# Altium PCB PCB_Rev1.PcbDoc
Units mil, origin at the board's own origin, x right, y up, seen from the top; angles counter-clockwise.
Board outline 1472.44 x 1251.97 mil, 4 copper layers (Top Layer, Layer 1 (GND), Layer 2 (PWR), Bottom Layer), stack 61.2 mil thick; 58 components, 41 nets, 213 pads, 68 vias.
Unrouted connection lines stored in the file: 48.
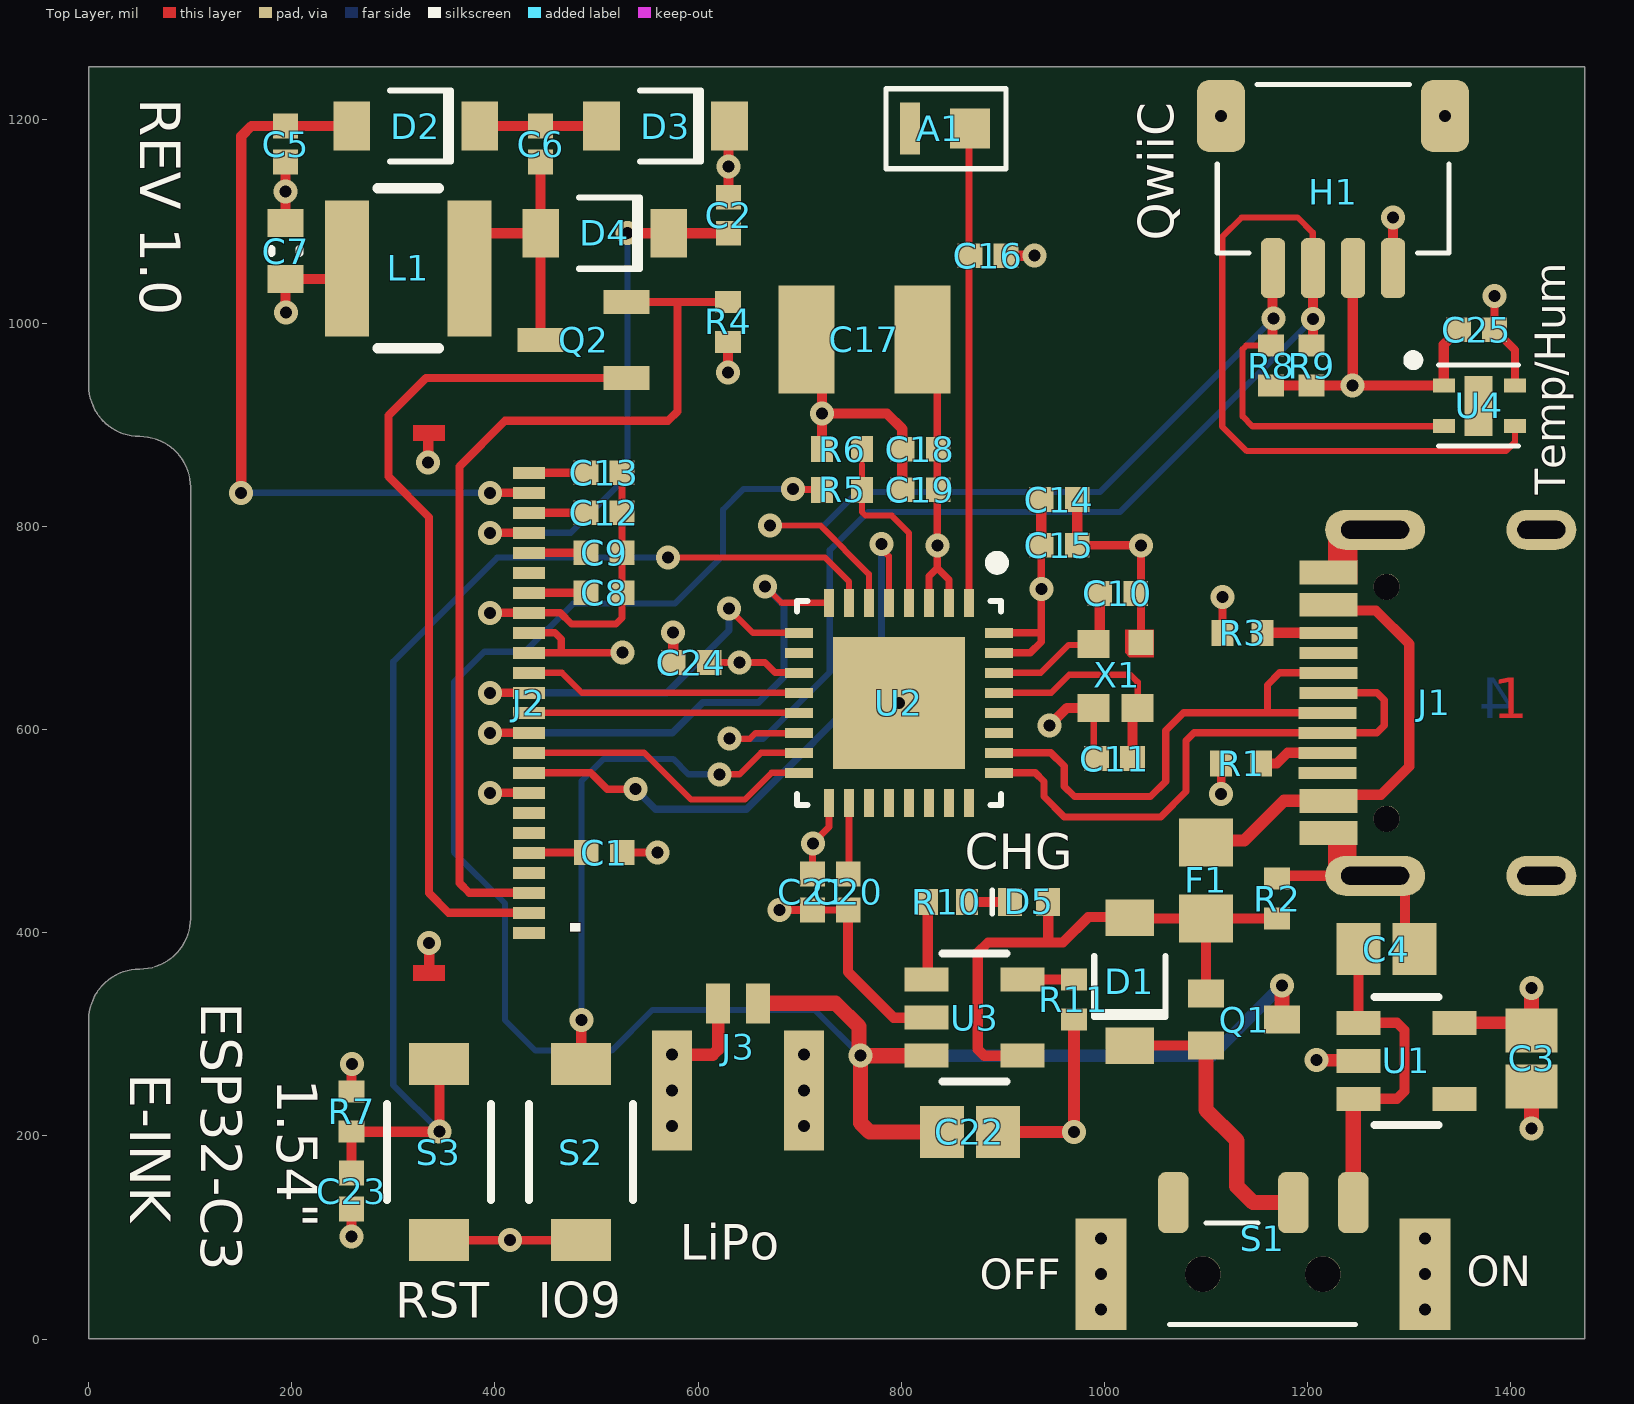
[diagram p0: Top Layer view]
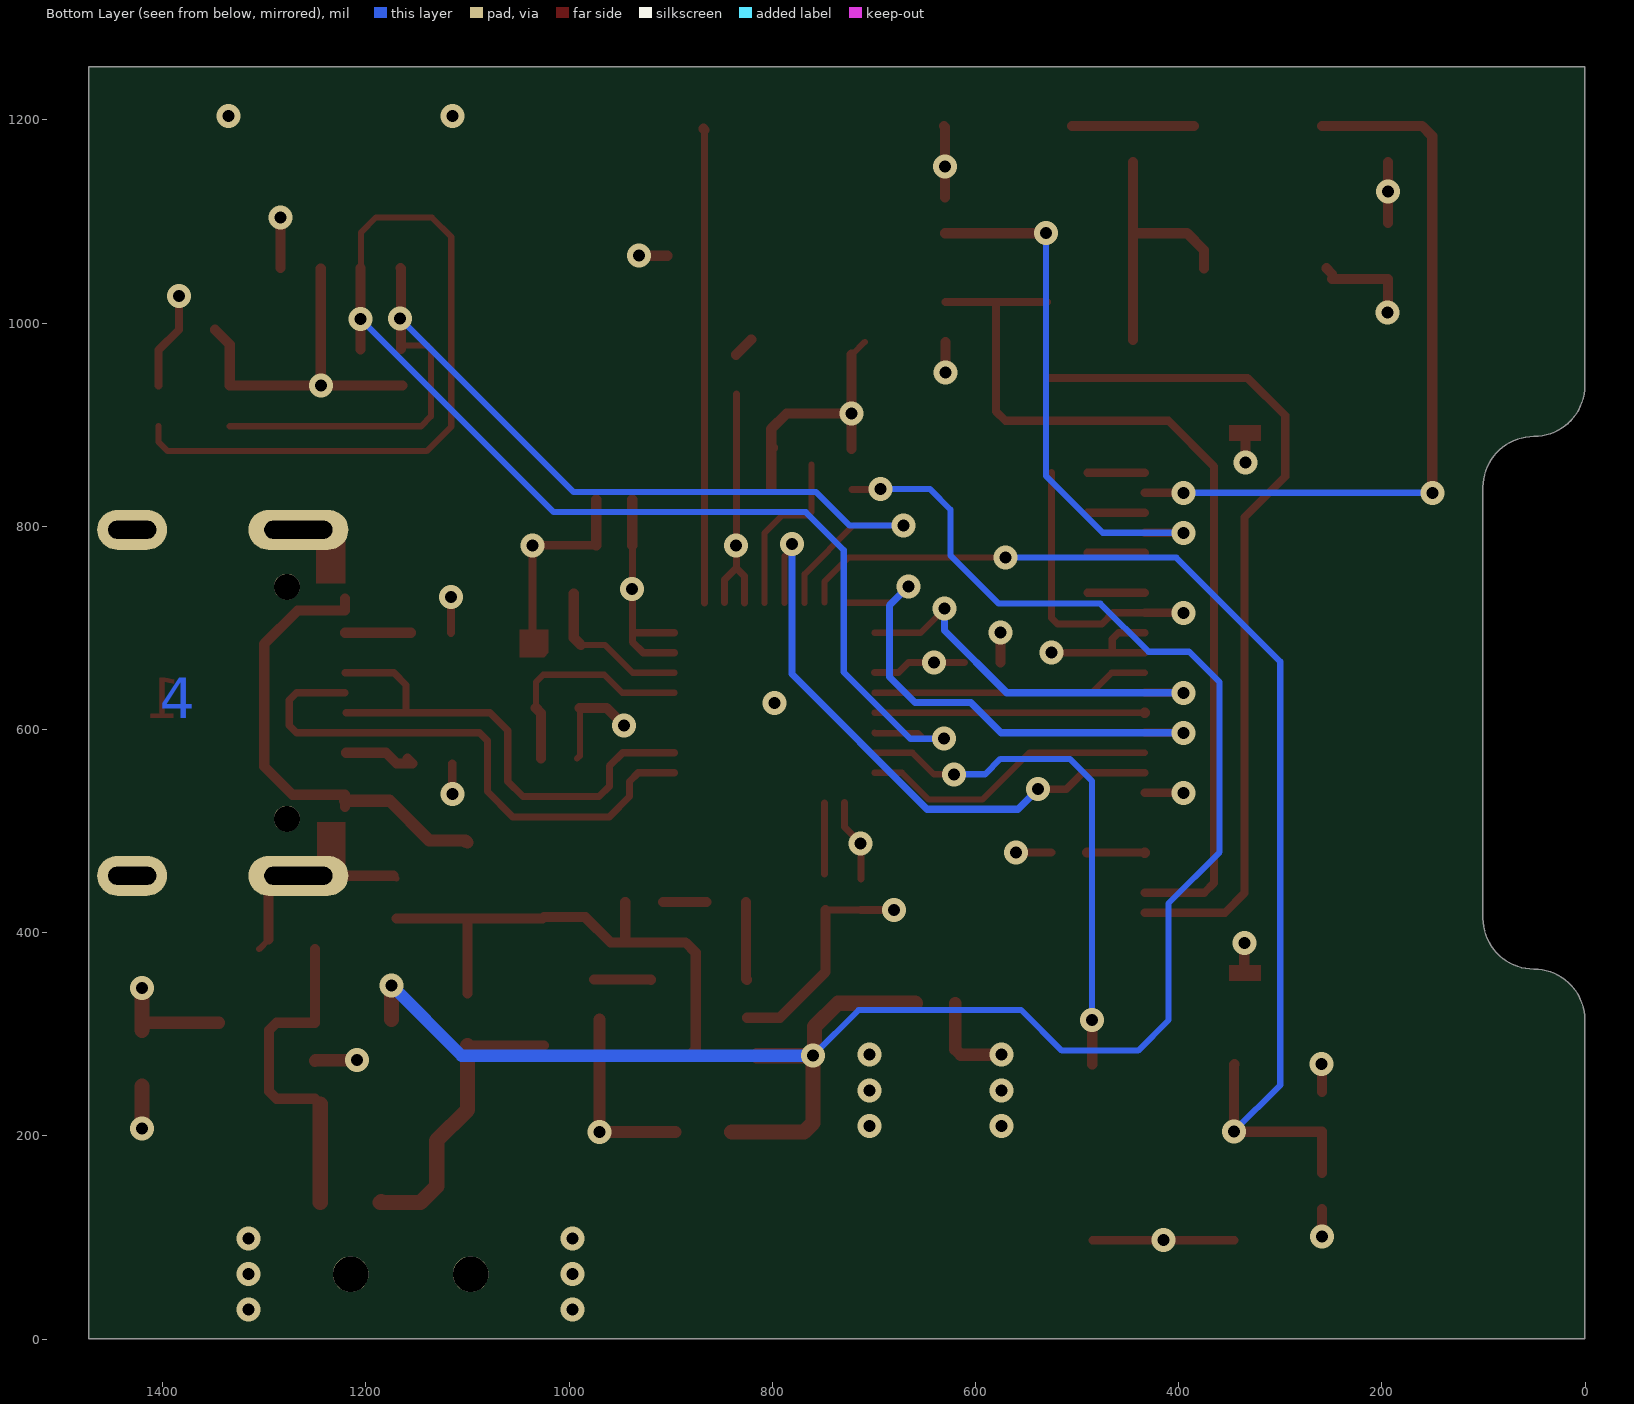
[diagram p1: Bottom Layer view, seen from below]
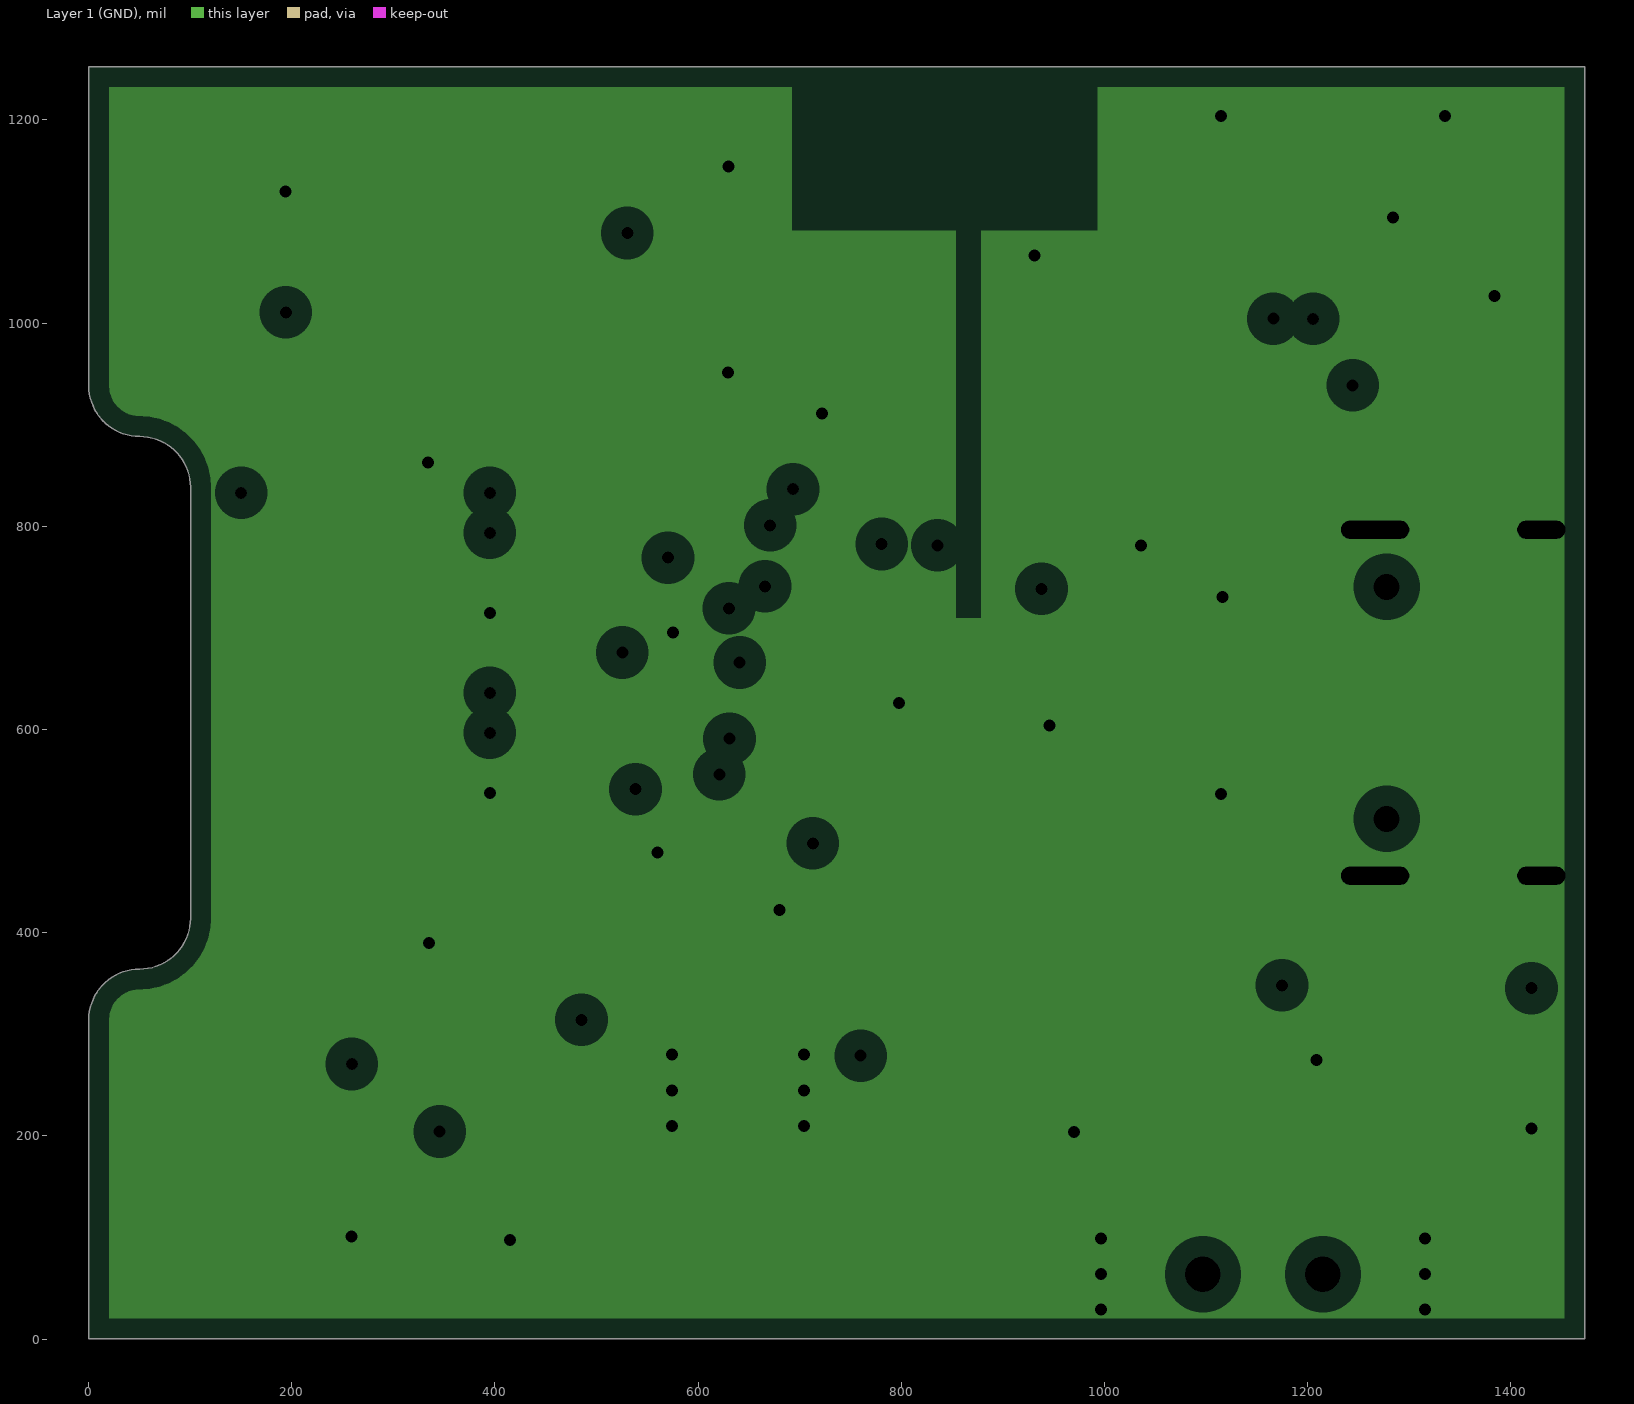
[diagram p2: Layer 1 (GND), clearances drawn from the general rule]
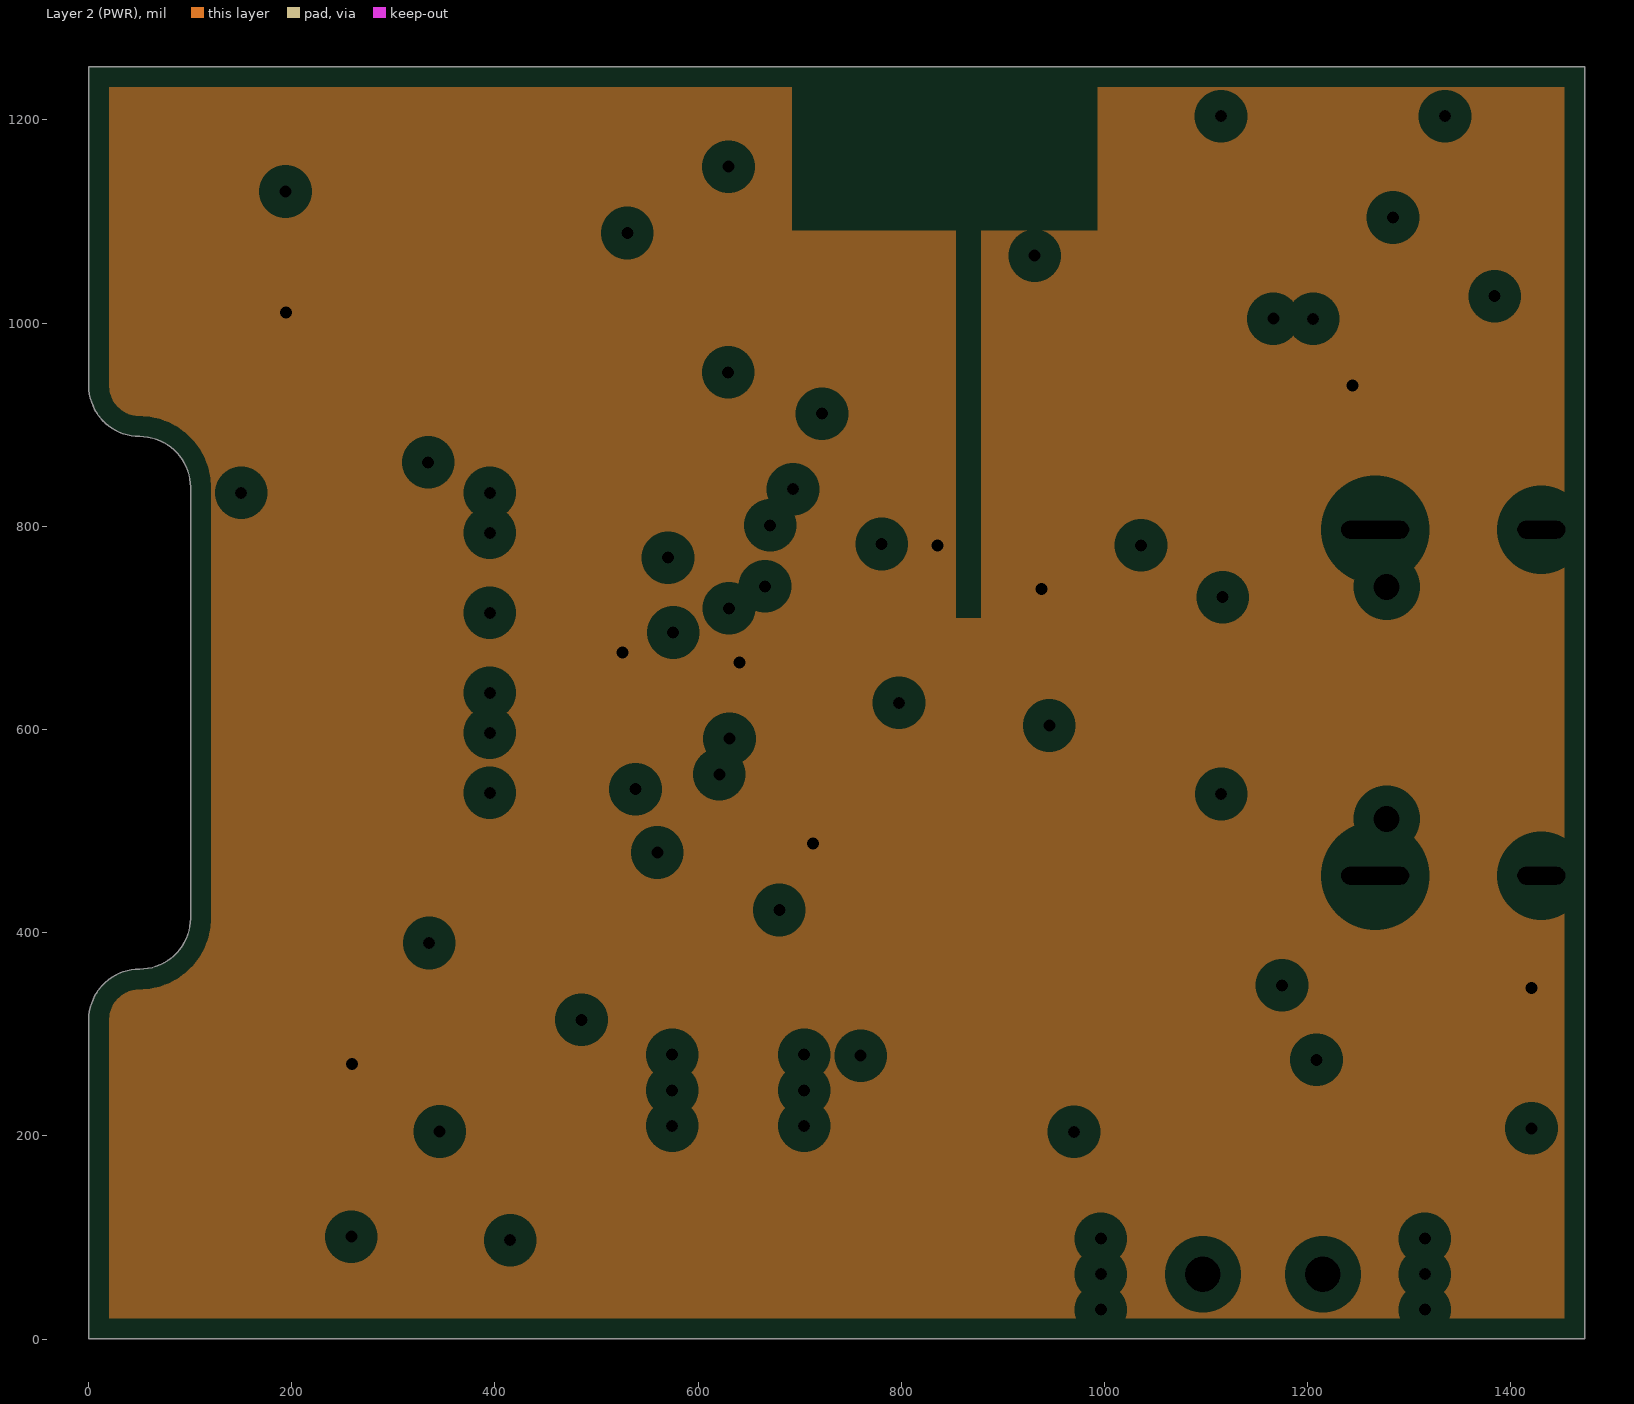
[diagram p3: Layer 2 (PWR), clearances drawn from the general rule]
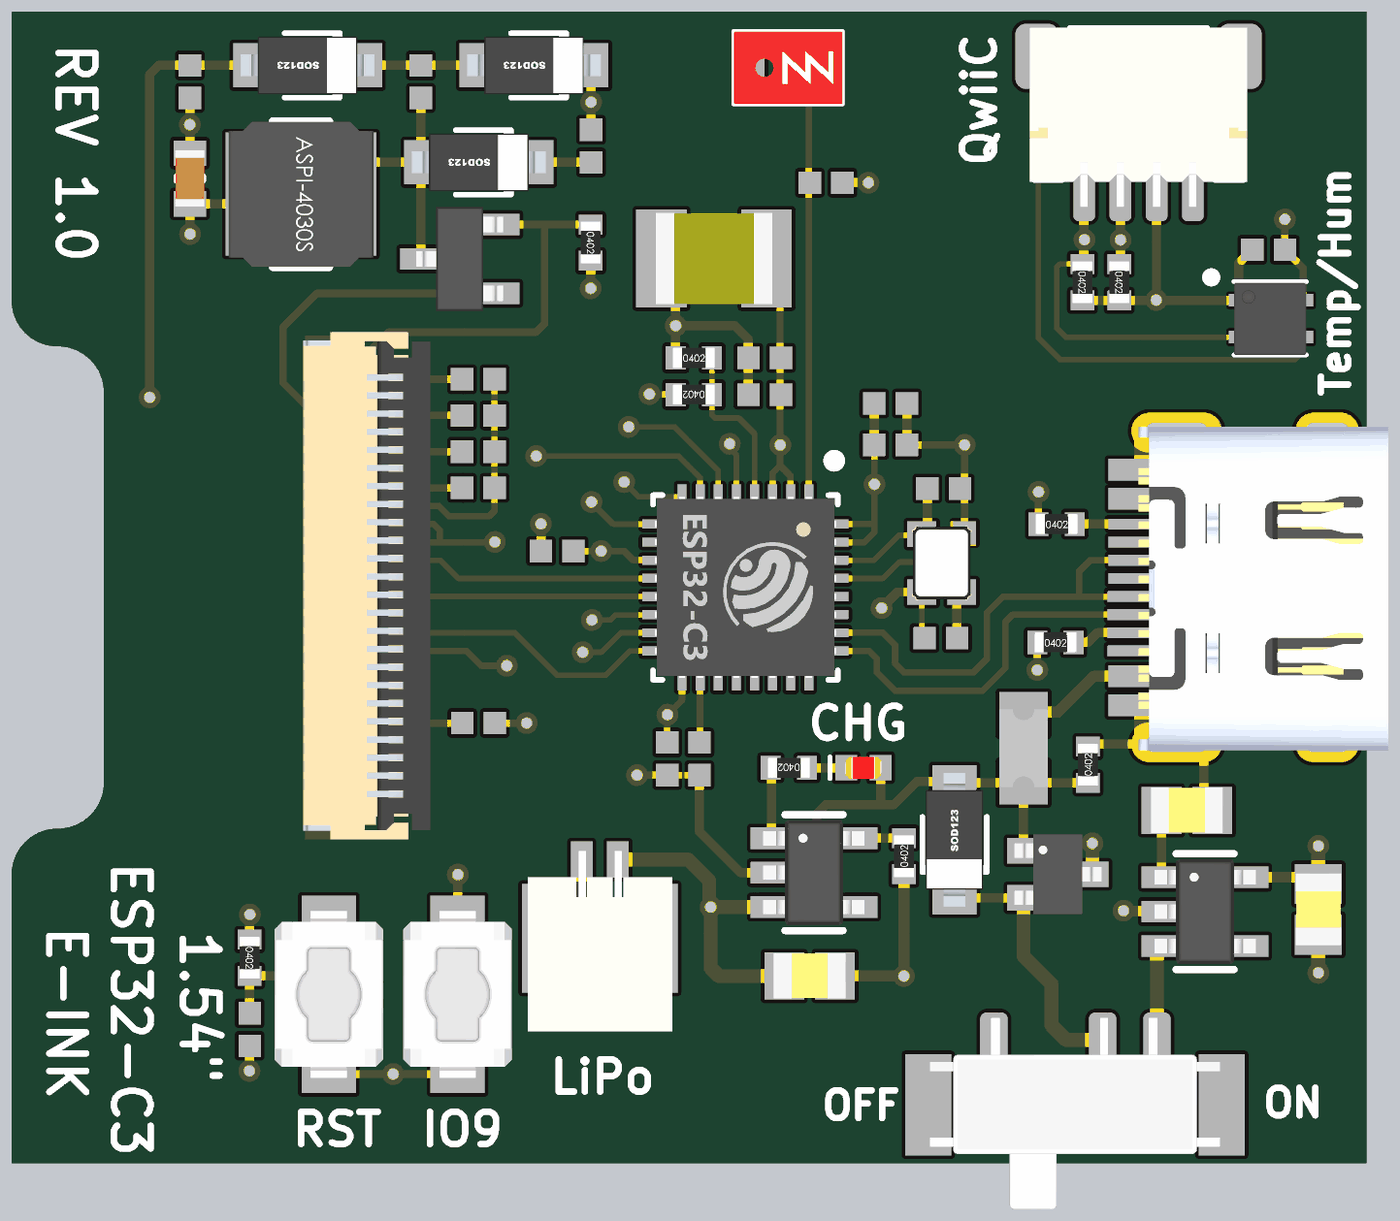
[diagram p4: 3D render of the assembled board from above, using the file's embedded part models]

## Layer stack, top to bottom
Top Solder: solder mask 0.4, Solder Resist, Dk 3.5
Top Layer: signal copper 1.4
Dielectric 2: prepreg 2.8, PP-006, Dk 4.1
Layer 1 (GND): plane copper 1.2, net GND
Dielectric 1: dielectric 50.4, FR-4, Dk 4.8
Layer 2 (PWR): plane copper 1.2, net +3.3V
Dielectric 3: prepreg 2.8, PP-006, Dk 4.1
Bottom Layer: signal copper 1.4
Bottom Solder: solder mask 0.4, Solder Resist, Dk 3.5

## Board outline
0.31,0.42 0.32,314.39 cw(c50.31,314.31) 50.42,364.31 ccw(c50.53,414.31) 100.53,414.24 100.53,838.56 ccw(c50.53,838.48) 50.42,888.48 cw(c50.31,938.48) 0.32,938.4 0.32,1252.39 1472.76,1252.39 1472.76,0.42

## Design rules (kind name [scope] priority, off if disabled: settings)
Clearance Clearance_U4 [All vs InComponent('U4')] p1: gap=5 ignorepadtopadclearanceinfootprint=FALSE
Clearance Clearance_J1 [All vs InComponent('J1')] p2: gap=5 ignorepadtopadclearanceinfootprint=FALSE
Clearance Clearance_J2 [All vs InComponent('J2')] p3: gap=5 ignorepadtopadclearanceinfootprint=FALSE
Clearance Clearance_U2 [All vs InComponent('U2')] p4: gap=5 ignorepadtopadclearanceinfootprint=FALSE
Clearance [All] p5: gap=10 ignorepadtopadclearanceinfootprint=FALSE except(0: Arc-Hole Track-Hole SMDPad-Hole THPad-Hole Via-Hole Fill-Hole Poly-Hole Region-Hole Text-Hole)
MinimumSolderMaskSliver [All] p1: minsoldermaskwidth=1.8
PlaneClearance [All] p1: clearance=20
PlaneConnect PlaneConnect_Via [(IsVia)] p1: planeconnectstyle=Direct reliefexpansion=20 reliefentries=4 reliefconductorwidth=10 reliefairgap=10
PlaneConnect [All] p2: planeconnectstyle=Relief reliefexpansion=20 reliefentries=4 reliefconductorwidth=10 reliefairgap=10
PolygonConnect [All] p1: connectstyle=Relief reliefconductorwidth=10 reliefentries=4 polygonreliefangle="90 Angle" airgapwidth=10
RoutingVias [All] p1: holewidth=28 width=50 viastyle="Through Hole" minholewidth=28 minwidth=50 maxholewidth=28 maxwidth=50
SilkToSilkClearance [All] p1: silktosilkclearance=2
SilkToSolderMaskClearance [IsPad] p1: minsilkscreentomaskgap=2 clearancetoexposedcopper=TRUE
SolderMaskExpansion [All] p1: expansion=4 istentingtop=FALSE
Width [All] p1: maxlimit=25 minlimit=6 preferedwidth=6
25 further rules are at their usual default settings.

## Components (designator, comment, footprint, x,y, rotation, side; value= is the part's Value field where it differs from the comment)
A1 "NN02-101" NN02-101 838.23,1191.4 r180 top value="Chip Antenna"
C1 "1uF" CAPC1005X56N 507.72,479 r180 top
C2 "1uF" CAPC1005X56N 630,1106.28 r90 top
C3 "10uF" CAPC2012X140N 1420.39,276.44 r270 top
C4 "10uF" CAPC2012X140N 1277.56,384 r0 top
C5 "1uF" CAPC1005X56N 194,1176.28 r90 top
C6 "1uF" CAPC1005X56N 445,1176.28 r270 top
C7 "2.2uF" CAPC1608X09L 194,1071.01 r90 top
C8 "1uF" CAPC1005X56N 507.48,734.67 r180 top
C9 "1uF" CAPC1005X56N 507.48,774.04 r180 top
C10 "15pF" CAPC1005X56N 1013.11,734 r180 top
C11 "15pF" CAPC1005X56N 1010.04,571.4 r0 top
C12 "1uF" CAPC1005X56N 507.48,813.41 r180 top
C13 "1uF" CAPC1005X56N 507.48,852.78 r180 top
C14 "1uF" CAPC1005X56N 955.47,826.4 r0 top
C15 "0.1uF" CAPC1005X56N 955.47,781.4 r0 top
C16 "1pF" CAPC1005X56N 885.47,1066.4 r0 top
C17 "47uF" CAPC3225X160N 763.62,984 r180 top
C18 "1uF" CAPC1005X56N 818.68,876 r180 top
C19 "0.1uF" CAPC1005X56N 818.68,836 r180 top
C20 "1uF" CAPC1005X56N 747.76,440.14 r270 top
C21 "0.1uF" CAPC1005X56N 712.76,440.14 r270 top
C22 "10uF" CAPC2012X140N 867.56,204 r0 top
C23 "0.1uF" CAPC1005X56N 259,145.85 r270 top
C24 "0.1uF" CAPC1005X56N 593.24,666 r180 top
C25 "0.1uF" CAPC1005X56N 1366.28,993.57 r0 top
D1 "MBR0520" SOD123 1025,352 r90 top
D2 "MBR0520-TP" SOD123 322,1194 r180 top value=MBR0520
D3 "MBR0520-TP" SOD123 568,1194 r180 top value=MBR0520
D4 "MBR0520-TP" SOD123 508,1088.57 r180 top value=MBR0520
D5 "Red Led" LED1005X40N-Red 925.98,430.42 r0 top
F1 "TLC-PSMD050" PTC2012X70L 1100,451.6 r90 top
H1 "QWiiC" SM04B-SRSS-TB 1225,1129 r180 top locked
J1 "USB-C" TYPE-C-31-M-12 1422.13,796.68 r90 top locked
J2 "24POS Flex Connector" 687124182122 433.39,626.4 r90 top
J3 "CON2" JST_Micro_2PIN 639.53,330.61 r0 top
L1 "68uH" "INDUCTOR, 4mmX4mm" 314.79,1054 r180 top
Q1 "LP1480WT1G" SC-70 1137.4,314.59 r0 top
Q2 "" SOT95P240X110-3N 487.32,983.57 r180 top
R1 "5.1K" "RESC1005X40L (0402 FOOTPRINT)" 1134.65,566.6 r0 top
R2 "100K" "RESC1005X40L (0402 FOOTPRINT)" 1170,433.68 r90 top
R3 "5.1K" "RESC1005X40L (0402 FOOTPRINT)" 1135.98,695.3 r0 top
R4 "2.2R" "RESC1005X40L (0402 FOOTPRINT)" 629.65,1001.28 r270 top
R5 "100K" "RESC1005X40L (0402 FOOTPRINT)" 741.71,836 r180 top
R6 "100K" "RESC1005X40L (0402 FOOTPRINT)" 741.71,876 r0 top
R7 "10K" "RESC1005X40L (0402 FOOTPRINT)" 259,223.88 r270 top
R8 "10K" "RESC1005X40L (0402 FOOTPRINT)" 1164,958.25 r270 top
R9 "10K" "RESC1005X40L (0402 FOOTPRINT)" 1204,958.25 r270 top
R10 "4.7K" "RESC1005X40L (0402 FOOTPRINT)" 845,430.42 r180 top
R11 "4K" "RESC1005X40L (0402 FOOTPRINT)" 970,334.31 r90 top
S1 "SWITCH SLIDE" K3-1296S-E1 1155.94,99.43 r0 top
S2 "=Value" TS-1088R-02526 485,184 r270 top
S3 "=Value" TS-1088R-02526 345,184 r270 top
U1 "HT7833" SOT95P280X144-5N 1297.24,274 r0 top
U2 "ESP32-C3" "VFQFN-32 -ESP32-C3" 797.76,626.4 r270 top locked
U3 "MCP73831T-2ACI/OT" SOT95P280X144-5N 872.24,316.4 r0 top value=MCP73831T-2ACI
U4 "SHTC3" "DFN-4 (2.0mm X 2.0mm)" 1369,918.57 r0 top value=Temp/Humid
X1 "40 Mhz" OSC20X16 1012.73,653.58 r270 top

## Footprints (in the part's own frame and the unit in brackets; to place one, negate y for a bottom-side part, rotate by r counter-clockwise, add the part's x,y. Pads: shape width x height; smd on the part's side, far side on the other; paste and mask are expansions set on the pad)
687124182122 [mm] "CONN FFC TOP/BOT 24POS 0.50MM R/A"
  rect 0.3x0.8 smd: 1(-5.75,0) 2(-5.25,0) 3(-4.75,0) 4(-4.25,0) 5(-3.75,0) 6(-3.25,0) 7(-2.75,0) 8(-2.25,0) 9(-1.75,0) 10(-1.25,0) 11(-0.75,0) 12(-0.25,0) 13(0.25,0) 14(0.75,0) 15(1.25,0) 16(1.75,0) 17(2.25,0) 18(2.75,0) 19(3.25,0) 20(3.75,0) 21(4.25,0) 22(4.75,0) 23(5.25,0) 24(5.75,0)
  Top Layer region: 6.55,2.1 6.95,2.1 6.95,2.9 6.55,2.9
  Top Layer region: -6.95,2.1 -6.55,2.1 -6.55,2.9 -6.95,2.9
  body extent -6.95,-0.55 7.05,2.95, height 0.96
CAPC1005X56N [mm] "Chip Capacitor, 2-Leads, Body 1.0x0.5mm, IPC Medium Density (0402 ceramic)"
  rect 0.62x0.62 smd: 1(-0.45,0) 2(0.45,0)
  body extent -0.55,-0.3 0.55,0.3, height 0.6
CAPC1608X09L [mm] "Chip Capacitor, 2-Leads, Body 1.6x0.8mm, IPC High Density (0603 dense)"
  rect 0.7x0.9 smd: 1(-0.7,0) 2(0.7,0)
  silkscreen extent -0.05,-0.35 0.05,0.35, body extent -0.89,-0.48 0.88,0.48, height 1.03
CAPC2012X140N [mm] "Chip Capacitor, 2-Leads, Body 2.0x1.3mm, IPC Medium Density (0805 ceramic)"
  rect 1.1x1.3 smd: 1(-0.7,0) 2(0.7,0)
  body extent -1,-0.62 1,0.63, height 1.24
CAPC3225X160N [mm] "Chip Capacitor, 2-Leads, Body 3.2x2.5mm, IPC Medium Density, (1210)"
  rect 1.4x2.7 smd: 1(-1.45,0) 2(1.45,0)
  body extent -1.61,-1.26 1.61,1.26, height 0.62
"DFN-4 (2.0mm X 2.0mm)" [mm] "DFN-4 (2.0mm X 2.0mm)"
  rect 0.55x0.35 smd mask+0.076: 1(-0.889,0.508) 2(-0.889,-0.508) 3(0.889,-0.508) 4(0.889,0.508)
  rect 0.7x1.5 smd paste-0.1 mask+0.076: 7(-0.025,0)
  silkscreen extent -1.78,-1 0.97,1.27, body extent -1.02,-1 0.98,1, height 0.75
"INDUCTOR, 4mmX4mm" [mm] "Inductor, 2-Leads, (4mmX4mm)"
  rect 1.1x3.4 smd: 1(-1.529,0) 2(1.529,0)
  silkscreen extent -0.76,-2 0.76,2, body extent -2,-2 2,2, height 3
JST_Micro_2PIN [mm]
  rect 0.6x1 smd: 1(0.5,0) 2(-0.5,0)
  rect 1x3 smd: ""(-1.65,-2.175) ""(1.65,-2.175)
  body extent -1.99,-4.74 2,0.24, height 2.9
K3-1296S-E1 [mil] "Toggle Switches SMD RoHS"
  rrect50% 30x60 smd: 1(89.06,35) 2(30,35) 3(-88.11,35)
  rect 50x110 smd: 4(-159.45,-35.43) 4(159.45,-35.43)
  round 35 hole 35 unplated: ""(-59.06,-35.43) ""(59.06,-35.43)
  silkscreen extent -92,-85 91,15, body extent -157,-149 158,59, height 60
LED1005X40N-Red [mm] "Chip LED 2-Leads, Body 1.0x0.5mm, (0402)"
  rect 0.6x0.7 smd: 1(-0.475,0) 2(0.475,0)
  silkscreen extent -0.92,-0.3 -0.92,0.3, body extent -0.5,-0.3 0.5,0.3, height 0.2
NN02-101 [mm] "COMPACT REACH XTEND - 101"
  rect 1x1 smd: 1(-0.75,0)
  rect 0.5x1.3 smd: 2(0.75,0)
  silkscreen extent -1.65,-1 1.35,1, body extent -1.65,-1 1.35,1, height 0.8
OSC20X16 [mm] "Crystal 2.0mm x 1.60mm 0.5mm height"
  rect 0.7x0.8 smd: 1(-0.783,-0.591) 2(0.817,-0.591) 3(0.817,0.509)
  rect 0.635x0.635 smd: 4(-0.817,0.591)
  Top Layer region: -1.138,0.196 -0.554,0.196 -0.453,0.298 -0.453,0.907 -1.138,0.907
  body extent -1.01,-0.87 1.04,0.78, height 0.4
PTC2012X70L [mm] "Chip Fuse, 2-Leads, Body 2.0x1.3mm, IPC Medium Density (0805)"
  rect 1.2x1.35 smd: 1(-0.95,0) 2(0.95,0)
  body extent -1.07,-0.67 1.08,0.68, height 0.66
"RESC1005X40L (0402 FOOTPRINT)" [mm] "Chip Resistor, 2-Leads, Body 1.0x0.5mm, IPC Medium Density (0402)"
  rect 0.55x0.65 smd: 1(-0.5,0) 2(0.5,0)
  body extent -0.57,-0.27 0.58,0.28, height 0.41
SC-70 [mm] "SOT23, 3-Leads, Body 2x1.25mm, Pitch 0.65mm"
  rect 0.9x0.7 smd: 1(-0.95,0.65) 2(-0.95,-0.65) 3(0.95,0)
  body extent -1.2,-1.1 1.2,1.1, height 1
SM04B-SRSS-TB [mm] "CONN HEADER 4POS .100 R/A QWIIC"
  rrect50% 0.6x1.5 smd: 1(1.5,1.9) 2(0.5,1.9) 3(-0.5,1.9) 4(-1.5,1.9)
  rrect50% 1.2x1.8 smd: 5(-2.8,-1.9) 5(2.8,-1.9)
  silkscreen extent -2.9,-2.69 2.9,1.52, body extent -3,-2.69 3,2.26, height 3.25
SOD123 [mil] "Molded Diode, 2-Leads, Body 2.85x1.8mm, IPC Medium Density (SOD123)"
  rect 36x48 smd: 1(-63,0) 2(63,0)
  silkscreen extent -35,-35 25,35, body extent -73,-31 73,31, height 50
SOT95P240X110-3N [mm] "SOT23, 3-Leads, Body 3.0x2.5mm (max), Pitch 0.95mm, IPC Medium Density"
  rect 1.15x0.6 smd: 1(-1.075,0.95) 2(-1.075,-0.95) 3(1.075,0)
  body extent -1.2,-1.45 1.2,1.45, height 0.99
SOT95P280X144-5N [mm] "SOT23, 5-Leads, Body 3.1x3.0mm (max), Pitch 0.95mm, IPC Medium Density (RFMD SOT23-5)"
  rect 1.1x0.6 smd: 1(-1.2,0.95) 2(-1.2,0) 3(-1.2,-0.95) 4(1.2,-0.95) 5(1.2,0.95)
  silkscreen extent -0.8,-1.6 0.8,1.6, body extent -1.4,-1.45 1.4,1.45, height 1.45
TS-1088R-02526 [mm] "SWITCH TACTILE SPST-NO 0.05A 12V"
  rect 1.05x1.5 smd: 1(-2.2,0) 2(2.2,0)
  silkscreen extent -1.2,-1.3 1.2,1.3, body extent -2.3,-1.5 2.3,1.5, height 2
TYPE-C-31-M-12 [mm] "USB-C Connector"
  oval 1x1.75 hole 0.45 slot 1.2 at 90 deg: 1(-8.65,-0.2) 1(0,-0.2)
  oval 1x2.5 hole 0.45 slot 1.7 at 90 deg: 1(-8.65,3.955) 1(0,3.955)
  rect 0.3x1.45 smd: A1(-7.726,5.119) A4(-6.926,5.117) A5(-5.575,5.142) A6(-4.575,5.142) A7(-4.075,5.117) A8(-3.075,5.117) A9(-1.727,5.117) A12(-0.924,5.117) B1(-1.224,5.117) B4(-2.021,5.117) B5(-2.575,5.117) B6(-3.575,5.117) B7(-5.075,5.142) B8(-6.075,5.142) B9(-6.626,5.117) B12(-7.426,5.119)
  round 0.65 hole 0.65 unplated: ""(-7.225,3.667) ""(-1.425,3.667)
  body extent -8.82,-1.89 0.12,5.01, height 3.31
"VFQFN-32 -ESP32-C3" [mm] "Quad Flat Pack 32 Pin 5x5x0.85mm"
  rect 0.7x0.25 smd: 1(-2.5,1.75) 2(-2.5,1.25) 3(-2.5,0.75) 4(-2.5,0.25) 5(-2.5,-0.25) 6(-2.5,-0.75) 7(-2.5,-1.25) 8(-2.5,-1.75) 17(2.5,-1.75) 18(2.5,-1.25) 19(2.5,-0.75) 20(2.5,-0.25) 21(2.5,0.25) 22(2.5,0.75) 23(2.5,1.25) 24(2.5,1.75)
  rect 0.25x0.7 smd: 9(-1.75,-2.5) 10(-1.25,-2.5) 11(-0.75,-2.5) 12(-0.25,-2.5) 13(0.25,-2.5) 14(0.75,-2.5) 15(1.25,-2.5) 16(1.75,-2.5) 25(1.75,2.5) 26(1.25,2.5) 27(0.75,2.5) 28(0.25,2.5) 29(-0.25,2.5) 30(-0.75,2.5) 31(-1.25,2.5) 32(-1.75,2.5)
  rect 3.3x3.3 smd paste-5 mask+0.102: 33(0,0)
  silkscreen extent -3.65,-2.55 2.55,2.6, body extent -2.5,-2.5 2.5,2.5, height 1.12

## Part data
A1: "Antenna Chip 2.4Gig", Manufacturer=Ignion, Part_Number=NN02-101, Vendor=Digi-Key
C1 C2 C5 C6 C8 C9 C12 C13 C14 C18 C20: library part CAP_0402, "CAP 1uF 0402", Part_Footprint=0402
C3 C4 C22: library part CAP_0805, "CAP 10uF 0805", Part_Footprint=0805
C7: library part CAP_0402, "CAP 2.2uF 0603", Part_Footprint=0603
C10 C11: library part CAP_0402, "CAP 15pF 0402", Part_Footprint=0402
C15 C19 C21 C23 C24 C25: library part CAP_0402, "CAP 0.1uF 0402", Part_Footprint=0402
C16: library part CAP_0402, "CAP 1pF 0402", Part_Footprint=0402
C17: library part CAP_0402, "CAP 47uF 1210", Part_Footprint=1210
D1: library part MBR0520-TP, "DIODE SCHOTTKY 20V 500MA SOD-123", Manufacturer=Micro, Part_Footprint=SOD-123, Part_Number=C78746, Vendor=LCSC
D2 D3 D4: "DIODE SCHOTTKY 20V 500MA SOD-123", Manufacturer=Micro, Part_Footprint=SOD-123, Part_Number=C78746, Vendor=LCSC
D5: library part LED_0402_SMALL_Red, "LED Red 0402", Manufacturer=Lite-On, Part_Footprint=0402, Part_Number=C364556, Vendor=LCSC
F1: library part PTC_FUSE, "PTC FUSE 500mA hold, 1A trip", Manufacturer=TLC, Part_Number=C261942, Vendor=LCSC
H1: library part SM04B-SRSS-TB, "CONN HEADER 4POS .100 R/A QWIIC", Manufacturer=JST, Part_Number=PRT-14417, Vendor=Digi-Key
J1: "CONN RECPT USB-C", Manufacturer=KHE, Part_Footprint=SMT, Part_Number=C165948, Vendor=LCSC
J2: library part 687124182122, "CONN FFC TOP/BOT 24POS 0.50MM R/A", Manufacturer=Wurth, Part_Number=687124182122, Vendor=Digi-Key
J3: library part JST_Micro_CONN_2PIN, "JST MIcro CONN 2POS"
L1: "INDUCTOR 68uH 20% 4mmx4mm", Manufacturer=SXN, Part_Footprint=4mmx4mm, Part_Number=C135265, Vendor=LCSC
Q1: "MOSFET P-CH 20V 1.4A SC-70", Manufacturer=LRC, Part_Footprint=SC-70, Part_Number=C172434, Vendor=LCSC
Q2: library part 2N7002K-T1-E3, "MOSFET N-CH 60V 300MA SOT-23", Manufacturer="Vishay Siliconix", Part_Footprint=SOT-23, Part_Number=2N7002K-T1-E3, Vendor=LCSC
R1 R3: library part RES_0402, "RES 5.1K 0402", Part_Footprint=0402
R2 R5 R6: library part RES_0402, "RES 100K 0402", Part_Footprint=0402
R4: library part RES_0402, "RES 2.2R 0402", Part_Footprint=0402
R7 R8 R9: library part RES_0402, "RES 10K 0402", Part_Footprint=0402
R10: library part RES_0402, "RES 4.7K 0402", Part_Footprint=0402
R11: library part RES_0402, "RES 4K 0402", Part_Footprint=0402
S1: library part K3-1296S-E1, "SWITCH SLIDE SMD", Manufacturer="Korean Hroparts Elec", Part_Number=K3-1296S-E1, Vendor=LCSC
S2 S3: library part TS-1088R-02526, "Tactile Micro Switch", Manufacturer=XUNPU, Part_Footprint=SMD, Part_Number=C455281, Vendor=LCSC
U1: "IC LDO 3.3V 0.5A SOT23-5", Manufacturer=Holtek, Part_Footprint=SOT23-5, Part_Number=C164106, Vendor=LCSC
U2: "WIFI/Bluetooth, VFQFN-32", Manufacturer=Espressif, Part_Footprint=QFN56, Part_Number=C529594, Vendor=LCSC
U3: "Charger IC Lithium-Ion/Polymer SOT23-5", Manufacturer=Microchip, Part_Number=MCP73831T-2ACI/OT, Vendor=Digi-Key
U4: "Humidity/Temperature Sensor", Manufacturer=Sensirion, Part_Number=SHTC3, Vendor=LCSC
X1: library part 40Mhz, "CRYSTAL 40MHZ 10PF SMD", Manufacturer=ECS, Part_Number=ECS-400-10-37B2-CKM, Vendor=Digi-Key

## Via types
v1: diameter 23.62, hole 11.81, Top Layer to Bottom Layer, tented both sides, 68 vias

## Nets (pads, with @x,y where several pads share a name; then routed paths per layer and width w, separated by ;. In a path a pad name is that pad's centre, name@x,y a point inside that pad or via, vN(x,y) a via of type N, cw(c..) or ccw(c..) an arc to the next point about the centre after c; other vN are vias at no path point)
+3.3V: C3.1 C7.1 C14.1 C15.1 C17.1 C18.1 C19.1 C21.1 C24.1 C25.1 H1.3 J2.15 J2.16 L1.2 R7.1 R8.2 R9.2 U1.5 U2.2 U2.3 U2.11 U2.17 U2.31 U2.32 U4.1 | length 1400.5
  Top Layer w6: v1(1244.26,938.82) v1@1244.47,939.04 ; H1.3@1244.47,1053.98 H1.3
  Top Layer w7: J2.15 465.39,675.61 ; J2.16 459.09,695.3 465.39,689 465.39,675.61 ; v1@525.16,675.61 465.39,675.61 ; C24.1 v1(640.96,666) 665.96,666 675.8,656.17 699.09,656.17 U2.11@699.25,656.01 ; C21.1@712.76,452.86 C21.1 712.76,487.86 v1(713.01,488.11) 728.86,503.96 U2.17 ; U2.3 827.28,750.89 835.39,759 ; 835.39,930 835.39,821 835.39,759 ; U2.2@846.89,724.91 846.89,747.5 835.39,759 ; U2.31 927.01,675.61 937.76,686.36 937.76,695.3 ; U2.32 937.76,695.3 ; C15.1 937.76,695.3
  Top Layer w10: v1@194,1010.39 C7.1 L1.2@249.02,1043.45 ; L1.2@249.02,1048.45 L1.2 ; R7.1 v1@259,270.61 ; C17.1 C17.1@835.71,969 ; C15.1 C14.1 ; R8.2 R9.2 v1@1244,938.57 ; v1(1244.26,938.82) v1@1244,938.57 ; v1@1244.47,939.04 H1.3@1244.47,1053.98 ; C25.1 1334,979 U4.1 v1@1244,938.57 ; C3.1@1412.99,311.4 C3.1
  Top Layer w12: U1.5 C3.1@1412.99,311.4
  Top Layer w15: C3.1 v1(1420.39,345.42)
  other v1: 259.26,270.86 525.41,675.87 938.01,738.61 835.65,781.26 194.26,1010.65
A0: R5.1 R6.2 U2.4 | length 170.4
  Top Layer w6: 761.39,861 R5.1 761.39,821 761.39,814.08 764.91,810.57 790.68,810.57 807.6,793.65 U2.4
D+: J1.A6 J1.B6 U2.26 | length 509.3
  Top Layer w7: U2.26 947.2,577.19 960.39,564 960.39,544 970.39,534 1045.39,534 1060.39,549 1060.39,599 1077.95,616.56 1160.39,616.56 ; J1.A6 1160.39,616.56 ; J1.B6 1172.32,655.93 1160.39,644 1160.39,616.56
D-: J1.A7 J1.B7 U2.25 | length 555.3
  Top Layer w7: U2.25 931.89,557.5 940.39,549 940.39,534 960.39,514 1055.39,514 1080.39,539 1080.39,589 1088.27,596.87 J1.B7 1268.27,596.87 1275.39,604 1275.39,629 1268.15,636.24 J1.A7
E-INK_BSY: J2.9 U2.5 | length 606
  Top Layer w6: v1(780.65,782.6) 780.65,777.83 787.91,770.56 U2.5
  Top Layer w7: J2.9 494.46,557.5 510.66,541.3 v1(538.41,541.3)
  Bottom Layer w7: v1(538.41,541.3) 558.11,521.6 647.6,521.6 780.65,654.65 v1(780.65,782.6)
E-INK_CS: J2.12 U2.13 | length 265.9
  Top Layer w6: J2.12 U2.13
E-INK_DC: J2.11 U2.8 | length 517.1
  Top Layer w6: v1(665.96,741) 682.13,724.83 U2.8
  Top Layer w8: v1(395.16,596.87) J2.11
  Bottom Layer w7: v1(395.16,596.87) 574.86,596.87 604.58,626.6 659.65,626.6 684.65,651.6 684.65,722.31 v1(665.96,741)
E-INK_RST: J2.10 U2.16 | length 296.1
  Top Layer w6: J2.10 547.01,577.19 593.2,531 645.96,531 672.46,557.5 U2.16
EN: C23.1 R7.2 S3.1 U2.7 | length 1196.6
  Top Layer w6: v1(570.41,769.3) 725.1,769.3 748.46,745.93 U2.7@748.46,724.91
  Top Layer w10: C23.1 R7.2 345.39,204.2 345.39,270.22 S3.1
  Bottom Layer w6: v1(345.65,204.45) 300,250.1 300,666.95 402.34,769.3 v1(570.41,769.3)
GDR: J2.2 Q2.1 | length 842.7
  Top Layer w8: J2.2 354.49,419.71 335.16,439.04 335.16,809.04 295.16,849.04 295.16,909.04 332.28,946.17 Q2.1
GND: C1.1 C2.2 C3.2 C4.2 C5.1 C7.2 C8.1 C9.1 C10.1 C11.1 C12.1 C13.1 C14.2 C15.2 C16.2 C17.2 C18.2 C19.2 C20.2 C21.2 C22.2 C23.2 C24.2 C25.2 D3.1 H1.4 H1.5 J1.1 J1.A1 J1.A12 J1.B1 J1.B12 J2.8 J2.17 J3. J3.2 R1.1 R2.2 R3.1 R4.2 R6.1 R11.1 S1.4 S2.2 S3.2 U1.2 U2.33 U3.2 U4.4 X1.2 X1.4 | length 2354.4
  Top Layer w6: C17.2@708.94,981.6 C17.2@721.34,969.2 ; X1.2 989.45,574.28 C11.1 ; R2.2 R2.2@1172.76,456.13 ; J1.1@1266.42,456.13 1286.91,456.13 J1.1@1295.71,447.33 ; C4.2@1295.71,393.41 C4.2
  Top Layer w7: J2.17 464.41,714.98 475.39,704 519.34,704 525.2,709.86 C8.1 C9.1 C12.1 C13.1 ; C21.2 C20.2
  Top Layer w8: S3.2 S2.2 ; v1(395.16,537.82) J2.8 ; v1(395.16,714.98) J2.17 ; C1.1 v1(560,479) ; v1(680,422.43) C21.2 ; C15.2 v1(1036,781.4) X1.4 ; v1(1114.96,536.6) R1.1 ; R3.1 v1(1116.3,730.3) ; v1(1384,1026.6) C25.2 1404,973.57 U4.4
  Top Layer w10: C7.2 C5.1 ; v1@259,101.09 C23.2 ; v1(334.39,863) 334.39,892 ; 335.39,361 v1(335.39,390) ; C24.2 v1(575.53,695.57) ; v1(629.65,951.6) R4.2 ; C2.2 630,1193 D3.1 ; R6.1 v1(722.02,911) ; C17.2@722.02,969.2 v1(722.02,911) ; C20.2 747.76,361.24 792.6,316.4 U3.2 ; C18.2@799.61,877.35 C18.2 ; C19.2 800.96,896 785.96,911 v1(722.02,911) ; C16.2 v1(931.4,1066.4) ; v1(945.71,604) 963.11,621.4 X1.2 ; C15.2 C14.2 ; R2.2@1172.76,456.13 J1.1@1266.42,456.13 ; H1.4 v1(1284.05,1104) ; C4.2@1295.71,393.41 J1.1@1295.71,447.33
  Top Layer w12: v1(574.57,279.98) 614.57,279.98 619.84,285.26 J3.2 ; C22.2 v1(970,204) R11.1 ; v1(1208.71,275) 1209.21,274.5 1249.5,274.5 U1.2
  Top Layer w15: v1(1420.39,207.46) C3.2
  other v1: 996.5,29 1315.39,29 996.5,64 1315.39,64 415,97.39 996.5,99 1315.39,99 258.74,100.84 574.57,209.98 704.49,209.98 574.57,244.98 704.49,244.98 704.49,279.98 797.76,626.4 194,1129.57 630,1154 1114.76,1203.8 1335.24,1203.8
GPIO2: H1.1 R8.1 U2.6 U4.2 | length 1102.4
  Top Layer w6: v1(670.96,801) 720.24,801 768.23,753.02 U2.6 ; R8.1 1139.51,977.94 1136,974.42 1136,908.2 1145.63,898.57 U4.2
  Top Layer w10: R8.1@1165.47,974.47 1165.47,1004.45 1165.47,1053.72 H1.1
  Bottom Layer w6: v1(670.96,801) 724.05,801 757.09,834.04 995.79,834.04 v1(1166.2,1004.45)
GPIO8: H1.2 R9.1 U2.14 U4.3 | length 1609.1
  Top Layer w6: v1(630.96,591) 650.96,591 656.4,596.44 698.89,596.44 U2.14 ; H1.2 1204.99,1054.52 1204.99,1089.21 1190.16,1104.04 1135.16,1104.04 1116,1084.88 1116,898.2 1140.16,874.04 1395.16,874.04 1404,882.88 U4.3
  Top Layer w10: R9.1@1205.16,974.16 1205.16,1004.3 1205.16,1054.04 H1.2
  Bottom Layer w6: v1(630.96,591) 664.05,591 729.65,656.6 729.65,776.6 767.09,814.04 1015.16,814.04 v1(1205.41,1004.3)
GPIO9: S2.1 U2.15 | length 516.5
  Top Layer w6: v1(620.96,556) 640.96,556 662.15,577.19 U2.15
  Top Layer w10: S2.1 v1@485,314.04
  Bottom Layer w6: v1(485.26,314.3) 485.26,549.26 507.09,571.09 575.42,571.09 590.51,556 v1(620.96,556)
LiPO: C22.1 J3.1 Q1.3 R5.2 U3.3 | length 2038.4
  Top Layer w7: v1@693.19,836.4 R5.2@721.62,836.4
  Top Layer w15: J3.1 735.39,330.61 758.35,307.65 758.35,280.65 v1(760,279) ; U3.3@815,279 v1(760,279) ; C22.1 768.79,204 760,212.79 v1(760,279) ; Q1.3 v1(1174.8,348.25)
  Bottom Layer w6: v1(693.44,836.66) 644.7,836.66 624.65,816.6 624.65,771.6 577.09,724.04 477.09,724.04 429.65,676.6 389.65,676.6 359.65,646.6 359.65,479.35 410,429 410,314 440,284 515,284 555,324 715,324 v1(760,279)
  Bottom Layer w12: v1(760,279) 1105.55,279 v1(1174.8,348.25)
MISO: U2.10
MOSI: J2.14 U2.12 | length 274.1
  Top Layer w6: J2.14 466.03,655.93 485.72,636.24 U2.12
NetA1_1: A1.1 C16.1 U2.1 | length 467
  Top Layer w7: U2.1 A1.1@866.65,1190.3
  Top Layer w10: A1.1@866.65,1190.3 A1.1
NetC1_2: C1.2 J2.5 | length 56.7
  Top Layer w8: J2.5@433.5,478.88 C1.2@489.88,478.88
  Top Layer w10: J2.5 J2.5@433.5,478.88 ; C1.2@489.88,478.88 C1.2
NetC4_1: C4.1 S1.1 U1.1 U1.3 | length 333.8
  Top Layer w10: U1.3@1245,231.6 U1.3 1287.99,236.6 1295.39,244 1295.39,304 1287.99,311.4 U1.1 C4.1
  Top Layer w15: S1.1 U1.3@1245,231.6
NetC6_1: C6.1 D2.1 D3.2 | length 120
  Top Layer w10: D2.1 C6.1 D3.2
NetC6_2: C6.2 D4.2 L1.1 Q2.3 | length 269.8
  Top Layer w10: L1.1 375,1071.91 391.65,1088.57 D4.2 ; Q2.3 D4.2 ; C6.2 D4.2
NetC8_2: C8.2 J2.18 | length 56.4
  Top Layer w8: J2.18 C8.2
NetC9_2: C9.2 J2.20 | length 56.4
  Top Layer w8: J2.20 C9.2
NetC10_2: C10.2 U2.30 X1.1 | length 157.1
  Top Layer w6: U2.30 937.32,655.93 964.56,683.16 X1.1@988.21,683.16
  Top Layer w10: X1.1@988.21,683.16 X1.1 995.39,690.35 C10.2
NetC11_2: C11.2 U2.29 X1.3 | length 224.3
  Top Layer w6: U2.29 947.64,636.24 965.39,654 1025.39,654 1032.76,646.64 X1.3
  Top Layer w10: C11.2 1027.76,616.4 X1.3
NetC12_2: C12.2 J2.22 | length 56.4
  Top Layer w8: J2.22 C12.2
NetC13_2: C13.2 J2.24 | length 56.4
  Top Layer w8: J2.24 C13.2
NetC20_1: C20.1 U2.18 | length 70
  Top Layer w7: C20.1@748.46,457.86 U2.18@748.46,527.9
NetD1_1: D1.1 Q1.2 S1.2 | length 289.9
  Top Layer w10: D1.1 Q1.2
  Top Layer w15: Q1.2 1100,225.73 1130.31,195.42 1130.31,150.42 1146.3,134.43 S1.2 S1.2@1184.91,135.47
NetD5_1: D5.1 R10.1 | length 42.6
  Top Layer w10: R10.1 D5.1
NetF1_2: F1.2 J1.A4 J1.A9 J1.B4 J1.B9 | length 468.5
  Top Layer w10: F1.2 F1.2@1102.95,489 ; J1.A4 1220.67,529.9 J1.B9 1272.2,535.8 1300,563.61 1300,684.39 1267.29,717.1 J1.B4 J1.A9
  Top Layer w12: F1.2 1101.84,490.84 1137.55,490.84 1176.61,529.9 J1.B9@1220.67,529.9
NetJ1_A5: J1.A5 R1.2 | length 76
  Top Layer w10: R1.2 R1.2@1158.98,571.25 ; R1.2@1154.65,566.6 1169.65,566.6 1180.24,577.19 J1.A5
NetJ1_B5: J1.B5 R3.2 | length 65
  Top Layer w10: R3.2 J1.B5
NetR10_2: R10.2 U3.1 | length 77
  Top Layer w10: U3.1 826.02,354.83 R10.2@826.02,430.42
NetR11_2: R11.2 U3.5 | length 56
  Top Layer w10: U3.5 919.59,353.9 969.9,353.9 R11.2 R11.2@975.39,354
RESE: J2.3 Q2.2 R4.1 | length 926.9
  Top Layer w8: J2.3 374.8,439.39 365.16,449.04 365.16,859.04 410.12,904 570.39,904 579.65,913.25 579.65,1020.97 ; Q2.2 579.65,1020.97 ; R4.1 579.65,1020.97
SCLK: J2.13 U2.9 | length 399.7
  Top Layer w6: v1@630.2,719.04 653.94,695.3 U2.9
  Top Layer w8: v1(395.16,636.24) J2.13
  Bottom Layer w7: v1(395.16,636.24) 569.29,636.24 630.46,697.41 v1(630.46,719.3)
VBUS: D1.2 D5.2 F1.1 Q1.1 R2.1 U3.4 | length 565
  Top Layer w10: U3.4 881.73,279 875.31,285.42 875.31,380.42 885.31,390.42 944.68,390.42 959.02,390.42 984.02,415.42 1024.58,415.42 D1.2 1026,414 F1.1@1100,414 ; 944.68,391.05 D5.2 ; Q1.1 F1.1@1100,414 ; F1.1 F1.1@1100,414 ; R2.1 F1.1@1100,414
VGH: C2.1 D4.1 J2.21 | length 535.8
  Top Layer w8: v1(395.16,793.72) J2.21
  Top Layer w10: v1@530.16,1088.57 D4.1 C2.1
  Bottom Layer w6: v1(395.16,793.72) 474.72,793.72 530.41,849.41 v1(530.41,1088.82)
VGL: C5.2 D2.2 J2.23 | length 746.6
  Top Layer w8: v1(395.16,833.09) J2.23
  Top Layer w10: v1(150.39,833.09) 150.39,1184 160.39,1194 C5.2 D2.2
  Bottom Layer w6: v1(150.39,833.09) v1(395.16,833.09)
pads on no net: A1.2 J1. J1.A8 J1.B8 J2.1 J2.4 J2.6 J2.7 J2.19 S1. S1.3 U1.4 U2.19 U2.20 U2.21 U2.22 U2.23 U2.24 U2.27 U2.28 U4.7

## Polygon pours and split planes (outlines as drawn)
GND on Layer 1 (GND) (split plane): 1452.66,20.51 20.41,20.51 20.41,314.39 20.37,314.86 20.69,319.01 21.79,323.58 23.59,327.93 26.05,331.94 29.11,335.52 32.69,338.58 36.7,341.04 41.05,342.84 45.62,343.94 49.87,344.27 50.38,344.22 50.38,344.24 50.38,344.22 50.42,344.22 50.56,344.23 57.4,344.57 64.2,345.58 70.87,347.25 77.35,349.57 83.57,352.51 89.47,356.04 94.99,360.14 100.09,364.76 104.71,369.85 108.8,375.38 112.34,381.28 115.28,387.49 117.6,393.97 119.27,400.64 120.28,407.45 120.6,413.91 120.63,414.24 120.63,838.56 120.6,838.88 120.28,845.35 119.27,852.15 117.6,858.82 115.28,865.3 112.34,871.52 108.8,877.42 104.71,882.94 100.09,888.04 94.99,892.66 89.47,896.75 83.57,900.29 77.35,903.23 70.87,905.55 64.2,907.22 57.4,908.23 50.56,908.56 50.42,908.58 50.38,908.57 50.38,908.56 50.38,908.57 49.87,908.52 45.62,908.86 41.05,909.95 36.7,911.76 32.69,914.21 29.11,917.27 26.05,920.85 23.59,924.86 21.79,929.21 20.69,933.79 20.37,937.93 20.41,938.4 20.41,1232.29 692.76,1232.29 692.76,1091.4 854.16,1091.4 854.16,709.95 878.16,709.95 878.16,1091.4 992.76,1091.4 992.76,1232.29 1452.66,1232.29
+3.3V on Layer 2 (PWR) (split plane): 1452.66,20.51 20.41,20.51 20.41,314.39 20.37,314.86 20.69,319.01 21.79,323.58 23.59,327.93 26.05,331.94 29.11,335.52 32.69,338.58 36.7,341.04 41.05,342.84 45.62,343.94 49.87,344.27 50.38,344.22 50.38,344.24 50.38,344.22 50.42,344.22 50.56,344.23 57.4,344.57 64.2,345.58 70.87,347.25 77.35,349.57 83.57,352.51 89.47,356.04 94.99,360.14 100.09,364.76 104.71,369.85 108.8,375.38 112.34,381.28 115.28,387.49 117.6,393.97 119.27,400.64 120.28,407.45 120.6,413.91 120.63,414.24 120.63,838.56 120.6,838.88 120.28,845.35 119.27,852.15 117.6,858.82 115.28,865.3 112.34,871.52 108.8,877.42 104.71,882.94 100.09,888.04 94.99,892.66 89.47,896.75 83.57,900.29 77.35,903.23 70.87,905.55 64.2,907.22 57.4,908.23 50.56,908.56 50.42,908.58 50.38,908.57 50.38,908.56 50.38,908.57 49.87,908.52 45.62,908.86 41.05,909.95 36.7,911.76 32.69,914.21 29.11,917.27 26.05,920.85 23.59,924.86 21.79,929.21 20.69,933.79 20.37,937.93 20.41,938.4 20.41,1232.29 692.76,1232.29 692.76,1091.4 854.16,1091.4 854.16,710.09 878.16,710.09 878.16,1091.4 992.76,1091.4 992.76,1232.29 1452.66,1232.29

## Other copper
Top Layer:
  rectangle net GND: 1220,449 1248,509
  rectangle net GND: 1220,744 1249,804
  pour cut-out: 692.76,1251.4 692.76,1091.4 992.76,1091.4 992.76,1251.4
  text "1" at 1382,611 h40
Bottom Layer:
  pour cut-out: 692.76,1251.4 692.76,1091.4 992.76,1091.4 992.76,1251.4
  text "4" at 1403,611 h40
Layer 1 (GND) (plane layer: these items are gaps in the copper):
  pour cut-out: 854.16,1252.24 854.16,709.95 878.16,709.95 878.16,1252.24
  pour cut-out: 692.76,1251.4 692.76,1091.4 992.76,1091.4 992.76,1251.4
  text "2" at 1377,611 h40
Layer 2 (PWR) (plane layer: these items are gaps in the copper):
  pour cut-out: 854.16,1252.39 854.16,710.09 878.16,710.09 878.16,1252.39
  pour cut-out: 692.76,1251.4 692.76,1091.4 992.76,1091.4 992.76,1251.4
  text "3" at 1377,611 h40

## Silkscreen, mask and mechanical layers (free items; w line width, h text height)
Top Overlay:
  text "REV 1.0" at 51,1221.57 h40 r270
  text "QwiiC" at 1068.39,1081 h35 r90
  text "Temp/Hum" at 1453.4,831 h30 r90
  text "CHG" at 862.31,462.42 h35
  text "ESP32-C3" at 111,331.57 h40 r270
  text "E-INK" at 41,261.57 h40 r270
  text "1.54\"" at 186,256.57 h40 r270
  text "LiPo" at 582,78 h35
  text "RST" at 302,21 h35
  text "IO9" at 442,21 h35
Mechanical 1:
  the board outline again, w10

## Text inside footprints (layer, text, board x,y; h text height)
S1: Top Overlay "OFF" at 877.4,49.24 h30; Top Overlay "ON" at 1356.73,52.19 h30